# Altium PCB hbridge.PcbDoc
Units mm, origin at the board's own origin, x right, y up, seen from the top; angles counter-clockwise.
Board outline 90 x 39 mm, 2 copper layers (Top Layer, Bottom Layer); 97 components, 71 nets, 364 pads, 101 vias.
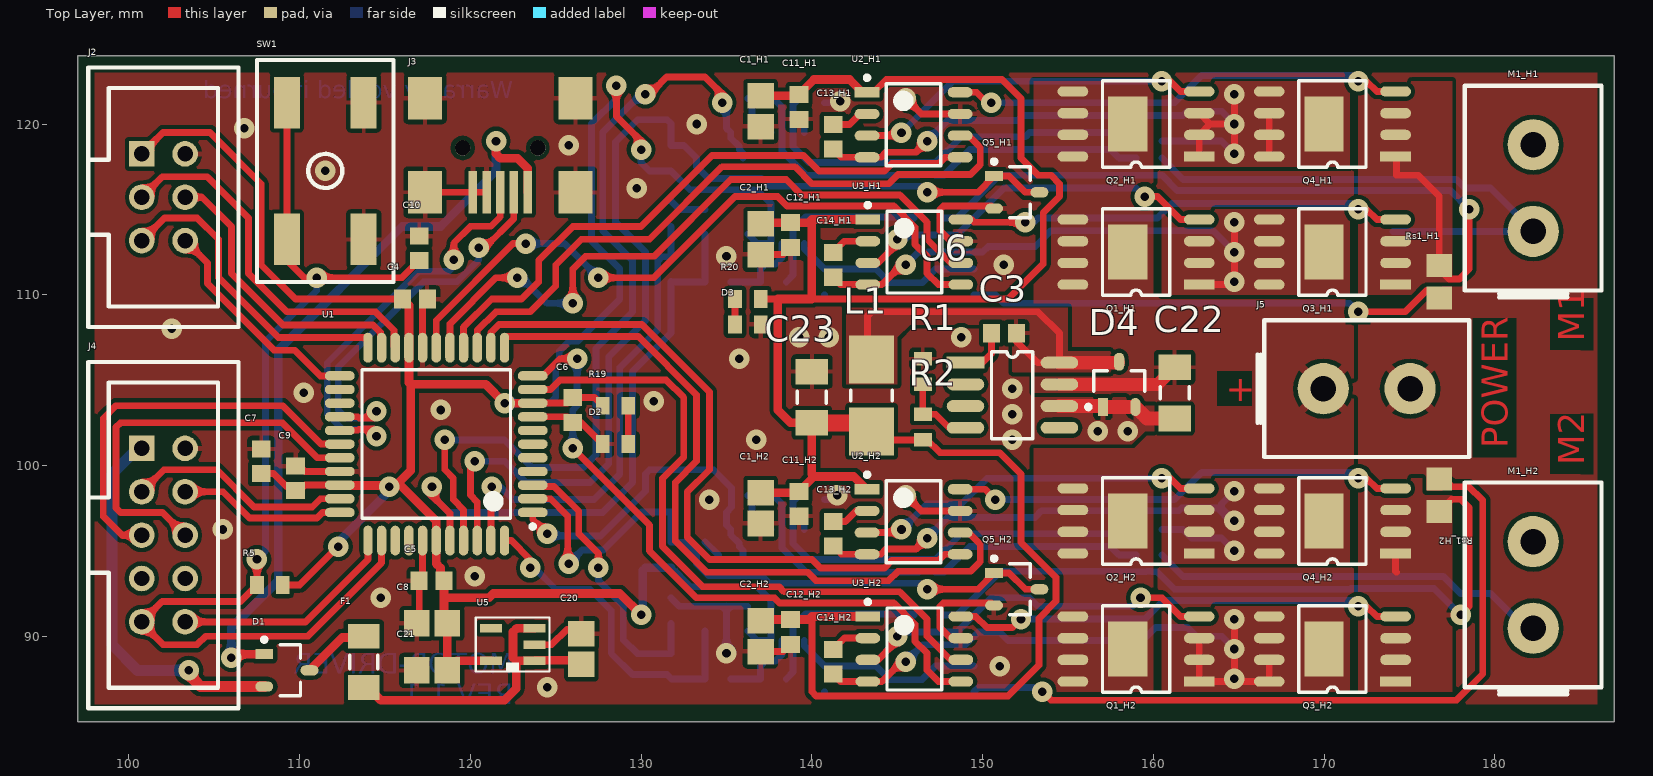
[diagram p0: Top Layer view]
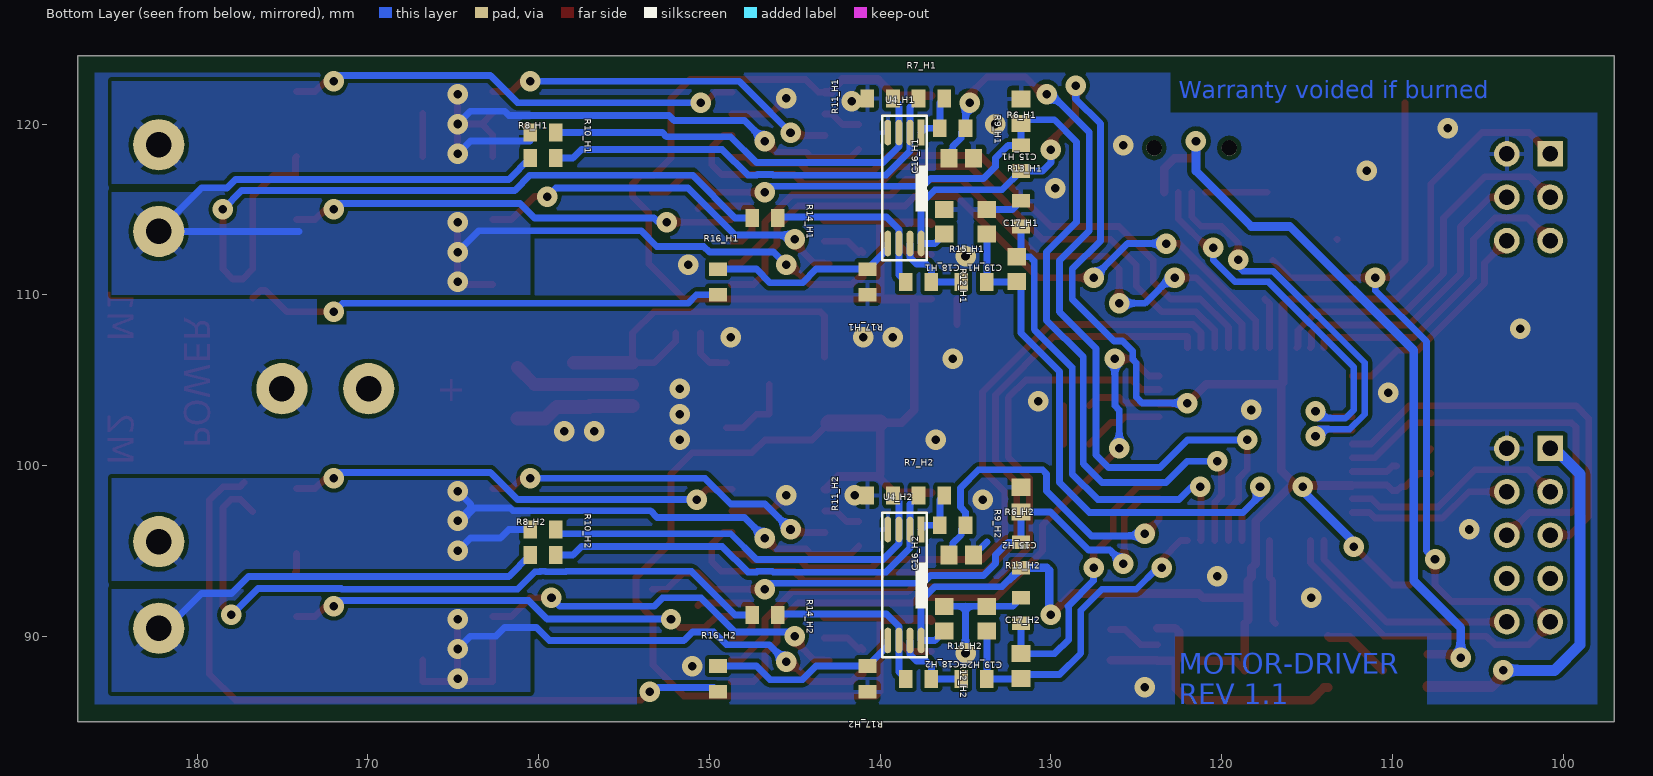
[diagram p1: Bottom Layer view, seen from below]

## Layer stack, top to bottom
Top Solder: solder mask 0.0102, Solder Resist, Dk 3.5
Top Layer: signal copper 0.0356
Dielectric1: dielectric 0.32, FR-4, Dk 4.8
Bottom Layer: signal copper 0.0356
Bottom Solder: solder mask 0.0102, Solder Resist, Dk 3.5

## Board outline
187,124 97,124 97,85 187,85

## Design rules (kind name [scope] priority, off if disabled: settings)
BoardOutlineClearance [All] p1: gap=1 ignorepadtopadclearanceinfootprint=FALSE
Clearance [All] p1: gap=0.25 ignorepadtopadclearanceinfootprint=FALSE except(0: Arc-Hole Track-Hole SMDPad-Hole THPad-Hole Via-Hole Fill-Hole Poly-Hole Region-Hole Text-Hole)
DiffPairsRouting [All] p1: maxlimit=0.254 minlimit=0.254 mostfreqgap=0.254 toplayer_minwidth=0.381 toplayer_maxwidth=0.381 toplayer_prefwidth=0.381 bottomlayer_minwidth=0.381 bottomlayer_maxwidth=0.381 bottomlayer_prefwidth=0.381 maxuncoupledlength=12.7
FabricationTestPointUsage TestPointUsage [All] p1: valid=0 allowmultiple=FALSE
FabricationTestpoint Testpoint [All] p1: side=3 testpointundercomponent=TRUE minsize=1.016 maxsize=2.54 preferedsize=1.524 minholesize=0 maxholesize=1.016 preferedholesize=0.813 testpointgrid=0.025 allowsidetop=TRUE allowsidebottom=TRUE usegrid=TRUE gridtolerance=0
HoleSize [All] p1: absolutevalues=TRUE maxlimit=5 minlimit=0.4 maxpercent=80.000 minpercent=20.000
PolygonConnect PolygonConnect_R16 [All vs InComponent('R16_H1') OR InComponent('R16_H2')] p1: thpad.connectstyle=Relief thpad.reliefconductorwidth=0.254 thpad.reliefentries=4 thpad.polygonreliefangle="90 Angle" thpad.airgapwidth=0.254 smdpad.connectstyle=NoConnect smdpad.reliefconductorwidth=0.254 smdpad.reliefentries=4 smdpad.polygonreliefangle="90 Angle" smdpad.airgapwidth=0.254 via.connectstyle=Relief via.reliefconductorwidth=0.254 via.reliefentries=4 via.polygonreliefangle="90 Angle" via.airgapwidth=0.254
PolygonConnect PolygonConnect_MAB_vias [InNet('MA_H1') OR InNet('MA_H2') OR InNet('MB_H1') OR InNet('MB_H2') vs IsVia] p2: connectstyle=Direct reliefconductorwidth=0.254 reliefentries=4 polygonreliefangle="90 Angle" airgapwidth=0.254
PolygonConnect PolygonConnect_GND [InNet('GND') vs IsVia] p3: connectstyle=Direct reliefconductorwidth=0.254 reliefentries=4 polygonreliefangle="90 Angle" airgapwidth=0.254
PolygonConnect PolygonConnect_MC [All vs InComponent('M1_H1') OR InComponent('M1_H2') or InComponent('J5')] p4: connectstyle=Relief reliefconductorwidth=0.5 reliefentries=4 polygonreliefangle="45 Angle" airgapwidth=0.254
PolygonConnect PolygonConnect_Q1-Q3 [All vs (HasFootprint('AGV_PWRSO2') OR InComponent('Rs1_H1') OR InComponent('Rs1_H2') OR InComponent('L1') OR InComponent('U6'))] p5: connectstyle=Direct reliefconductorwidth=0.254 reliefentries=4 polygonreliefangle="90 Angle" airgapwidth=0.254
PolygonConnect [All] p6: connectstyle=Relief reliefconductorwidth=0.254 reliefentries=4 polygonreliefangle="90 Angle" airgapwidth=0.254
RoomDefinition H2 [InComponentClass('H2')] p1: confinementstyle=ConfineIn formatcopy=TRUE lockcomponents=FALSE outline 130,85 187,85 187,100.75 130,100.75
RoomDefinition H1 [InComponentClass('H1')] p2: confinementstyle=ConfineIn formatcopy=TRUE lockcomponents=FALSE outline 130,108.25 187,108.25 187,124 130,124
RoomDefinition controller [InComponentClass('controller')] p3: confinementstyle=ConfineIn formatcopy=TRUE lockcomponents=FALSE outline 97,85 130,85 130,124 97,124
RoutingVias [All] p1: holewidth=0.5 width=1.2 viastyle="Through Hole" minholewidth=0.4 minwidth=0.9 maxholewidth=5 maxwidth=6
SilkToSolderMaskClearance SilkscreenOverComponentPads [IsPad] p1: minsilkscreentomaskgap=0.2 clearancetoexposedcopper=TRUE
SolderMaskExpansion SolderMaskExpansion_tentedvias [IsVia and (WithinRoom('H1') or WithinRoom('H2'))] p1 off: expansion=-5
SolderMaskExpansion [All] p2: expansion=0.102
Width "Schematic Width Constraint_5" [InNet('NetD1_3')] p1: maxlimit=5 minlimit=0.4 preferedwidth=0.75
Width "Schematic Width Constraint_4" [InNet('NetC20_2')] p2: maxlimit=5 minlimit=0.4 preferedwidth=0.75
Width "Schematic Width Constraint_2" [InNet('VBUS')] p3: maxlimit=5 minlimit=0.4 preferedwidth=0.75
Width "Schematic Width Constraint_1" [InNet('5V')] p4: maxlimit=5 minlimit=0.4 preferedwidth=0.75
Width "Schematic Width Constraint" [InNet('3V3')] p5: maxlimit=5 minlimit=0.4 preferedwidth=0.75
Width "Schematic Width Constraint_3" [InNet('VBAT')] p6: maxlimit=5 minlimit=0.4 preferedwidth=0.75
Width [All] p7: maxlimit=5 minlimit=0.25 preferedwidth=0.4
25 further rules are at their usual default settings.

## Classes and differential pairs
component class controller: C4 C5 C6 C7 C8 C9 C10 J2 J3 J4 R5 SW1 U1
component class H1: C1_H1 C2_H1 C11_H1 C12_H1 C13_H1 C14_H1 C15_H1 C16_H1 C17_H1 C18_H1 C19_H1 M1_H1 Q1_H1 Q2_H1 Q3_H1 Q4_H1 Q5_H1 R6_H1 R7_H1 R8_H1 R9_H1 R10_H1 R11_H1 R12_H1 R13_H1 R14_H1 R15_H1 R16_H1 R17_H1 Rs1_H1 U2_H1 U3_H1 U4_H1
component class H2: C1_H2 C2_H2 C11_H2 C12_H2 C13_H2 C14_H2 C15_H2 C16_H2 C17_H2 C18_H2 C19_H2 M1_H2 Q1_H2 Q2_H2 Q3_H2 Q4_H2 Q5_H2 R6_H2 R7_H2 R8_H2 R9_H2 R10_H2 R11_H2 R12_H2 R13_H2 R14_H2 R15_H2 R16_H2 R17_H2 Rs1_H2 U2_H2 U3_H2 U4_H2
component class PSU: C3 C20 C21 C22 C23 D1 D2 D3 D4 F1 J5 L1 R1 R2 R19 R20 U5 U6
channel class hbridge: H1 H2
differential pair D: +D_P -D_N

## Components (designator, comment, footprint, x,y, rotation, side; value= is the part's Value field where it differs from the comment)
C1_H1 "CAP" CAPC2012X11M 137,120.75 r90 top (schematic designator C1)
C1_H2 "CAP" CAPC2012X11M 137,97.5 r90 top (schematic designator C1)
C2_H1 "CAP" CAPC2012X11M 137,113.25 r90 top (schematic designator C2)
C2_H2 "CAP" CAPC2012X11M 137,90 r90 top (schematic designator C2)
C3 "CAP" CAPC1608X08M 151.25,107.75 r180 top
C4 "CAP" CAPC1608X08M 116.75,109.75 r180 top
C5 "CAP" CAPC1608X08M 117.725,93.25 r0 top
C6 "CAP" CAPC1608X08M 126,103.25 r90 top
C7 "CAP" CAPC1608X08M 107.75,100.25 r270 top
C8 "CAP" CAPC2012X11M 117.75,90.75 r0 top
C9 "CAP" CAPC1608X08M 109.75,99.25 r270 top
C10 "CAP" CAPC1608X08M 117,112.725 r270 top
C11_H1 "CAP" CAPC1608X08M 139.25,121 r90 top (schematic designator C11)
C11_H2 "CAP" CAPC1608X08M 139.25,97.75 r90 top (schematic designator C11)
C12_H1 "CAP" CAPC1608X08M 138.75,113.5 r90 top (schematic designator C12)
C12_H2 "CAP" CAPC1608X08M 138.75,90.25 r90 top (schematic designator C12)
C13_H1 "CAP" CAPC1608X08M 141.25,119.25 r90 top (schematic designator C13)
C13_H2 "CAP" CAPC1608X08M 141.25,96 r90 top (schematic designator C13)
C14_H1 "CAP" CAPC1608X08M 141.25,111.75 r90 top (schematic designator C14)
C14_H2 "CAP" CAPC1608X08M 141.25,88.5 r90 top (schematic designator C14)
C15_H1 "CAP" CAPC1608X08M 131.75,120.75 r270 bottom (schematic designator C15)
C15_H2 "CAP" CAPC1608X08M 131.75,98 r270 bottom (schematic designator C15)
C16_H1 "CAP" CAPC1608X08M 135.25,118 r0 bottom (schematic designator C16)
C16_H2 "CAP" CAPC1608X08M 135.25,94.75 r0 bottom (schematic designator C16)
C17_H1 "CAP" CAPC1608X08M 132,111.5 r90 bottom (schematic designator C17)
C17_H2 "CAP" CAPC1608X08M 131.75,88.25 r90 bottom (schematic designator C17)
C18_H1 "CAP" CAPC1608X08M 136.25,114.275 r270 bottom (schematic designator C18)
C18_H2 "CAP" CAPC1608X08M 136.25,91.025 r270 bottom (schematic designator C18)
C19_H1 "CAP" CAPC1608X08M 133.75,114.275 r270 bottom (schematic designator C19)
C19_H2 "CAP" CAPC1608X08M 133.75,91.025 r270 bottom (schematic designator C19)
C20 "CAP" CAPC2012X11M 126.5,89.25 r270 top
C21 "CAP" CAPC2012X11M 117.75,88 r0 top
C22 "CAP" CAPC3216X14M 161.25,104.25 r90 top
C23 "CAP" CAPC3216X14M 140,104 r270 top
D1 "BAS40-05" SOT23 109.25,88 r0 top
D2 "RED" RESC1608X06M 128.5,101.25 r180 top
D3 "RED" RESC1608X06M 136.25,108.25 r0 top
D4 "BAS40-05" SOT23 158,104.75 r90 top
F1 "POLYFUSE" RESC3216X07M 113.75,88.5 r90 top
J2 "IDC6" IDC6 102.02,115.71 r0 top
J3 "USBMINI" MINI_USB 121.75,118.75 r180 top
J4 "IDC10" IDC10 102.02,95.92 r0 top
J5 "VBAT" BAT_CNCTR 172.5,104.5 r90 top locked
L1 "IND" INDC3924X34M 143.5,104.1 r270 top
M1_H1 "VBAT" BAT_CNCTR 182.25,116.25 r180 top (schematic designator M1)
M1_H2 "VBAT" BAT_CNCTR 182.25,93 r180 top locked (schematic designator M1)
Q1_H1 "PSMN014-10YS" AGV_PWRSO2 162.691,110.595 r180 top (schematic designator Q1)
Q1_H2 "PSMN014-10YS" AGV_PWRSO2 162.691,87.345 r180 top (schematic designator Q1)
Q2_H1 "PSMN014-10YS" AGV_PWRSO2 162.691,118.095 r180 top (schematic designator Q2)
Q2_H2 "PSMN014-10YS" AGV_PWRSO2 162.691,94.845 r180 top (schematic designator Q2)
Q3_H1 "PSMN014-10YS" AGV_PWRSO2 174.191,110.595 r180 top (schematic designator Q3)
Q3_H2 "PSMN014-10YS" AGV_PWRSO2 174.191,87.345 r180 top locked (schematic designator Q3)
Q4_H1 "PSMN014-10YS" AGV_PWRSO2 174.191,118.095 r180 top (schematic designator Q4)
Q4_H2 "PSMN014-10YS" AGV_PWRSO2 174.191,94.845 r180 top locked (schematic designator Q4)
Q5_H1 "" SOT23 152,116 r0 top (schematic designator Q5)
Q5_H2 "" SOT23 152,92.75 r0 top (schematic designator Q5)
R1 "RES" RESC1608X06M 146.5,105.5 r270 top
R2 "RES" RESC1608X06M 146.5,102.25 r270 top
R5 "RES" RESC1608X06M 108.25,93 r0 top
R6_H1 "RES" RESC1608X06M 131.75,118 r270 bottom (schematic designator R6)
R6_H2 "RES" RESC1608X06M 131.75,94.75 r270 bottom (schematic designator R6)
R7_H1 "RES" RESC1608X06M 137,121.5 r180 bottom (schematic designator R7)
R7_H2 "RES" RESC1608X06M 137,98.25 r180 bottom (schematic designator R7)
R8_H1 "RES" RESC1608X06M 159.75,118 r180 bottom (schematic designator R8)
R8_H2 "RES" RESC1608X06M 159.75,94.75 r180 bottom (schematic designator R8)
R9_H1 "RES" RESC1608X06M 135.75,119.75 r180 bottom (schematic designator R9)
R9_H2 "RES" RESC1608X06M 135.75,96.5 r180 bottom (schematic designator R9)
R10_H1 "RES" RESC1608X06M 159.75,119.5 r180 bottom (schematic designator R10)
R10_H2 "RES" RESC1608X06M 159.75,96.25 r180 bottom (schematic designator R10)
R11_H1 "RES" RESC1608X06M 140,121.5 r0 bottom (schematic designator R11)
R11_H2 "RES" RESC1608X06M 140,98.25 r0 bottom (schematic designator R11)
R12_H1 "RES" RESC1608X06M 137.75,110.75 r180 bottom (schematic designator R12)
R12_H2 "RES" RESC1608X06M 137.75,87.5 r180 bottom (schematic designator R12)
R13_H1 "RES" RESC1608X06M 131.75,114.75 r90 bottom (schematic designator R13)
R13_H2 "RES" RESC1608X06M 131.75,91.5 r90 bottom (schematic designator R13)
R14_H1 "RES" RESC1608X06M 146.75,114.5 r180 bottom (schematic designator R14)
R14_H2 "RES" RESC1608X06M 146.75,91.25 r180 bottom (schematic designator R14)
R15_H1 "RES" RESC1608X06M 134.5,110.75 r180 bottom (schematic designator R15)
R15_H2 "RES" RESC1608X06M 134.5,87.5 r180 bottom (schematic designator R15)
R16_H1 "RES" RESC1608X06M 149.5,110.75 r90 bottom (schematic designator R16)
R16_H2 "RES" RESC1608X06M 149.5,87.5 r90 bottom (schematic designator R16)
R17_H1 "RES" RESC1608X06M 140.75,110.75 r270 bottom (schematic designator R17)
R17_H2 "RES" RESC1608X06M 140.75,87.5 r270 bottom (schematic designator R17)
R19 "RES" RESC1608X06M 128.5,103.5 r0 top
R20 "RES" RESC1608X06M 136.25,109.75 r180 top
Rs1_H1 "RES" RESC2012X07M 176.75,110.75 r90 top (schematic designator Rs1)
Rs1_H2 "RES" RESC2012X07M 176.75,98.25 r270 top (schematic designator Rs1)
SW1 "SWITCH" Switch_pad 111.5,117.25 r270 top
U1 "" 44A_N 118,101.25 r180 top
U2_H1 "MIC4605-1YM" SOIC8 145.959,119.955 r0 top (schematic designator U2)
U2_H2 "MIC4605-1YM" SOIC8 145.959,96.705 r0 top (schematic designator U2)
U3_H1 "MIC4605-1YM" SOIC8 146,112.5 r0 top (schematic designator U3)
U3_H2 "MIC4605-1YM" SOIC8 146,89.25 r0 top (schematic designator U3)
U4_H1 "" TSSOP8 137.6,119.5 r270 bottom (schematic designator U4)
U4_H2 "" TSSOP8 137.6,96.25 r270 bottom (schematic designator U4)
U5 "MIC5504" SOT23-5 123.75,88.56 r180 top
U6 "LM2671M-ADJ" AGV_SO-8 149,106.02 r0 top

## Footprints (in the part's own frame and the unit in brackets; to place one, negate y for a bottom-side part, rotate by r counter-clockwise, add the part's x,y. Pads: shape width x height; smd on the part's side, far side on the other; paste and mask are expansions set on the pad)
44A_N [mm] "Thin QFP, 44-Leads, Body 10x10mm, Pitch 0.8mm, IPC Medium Density"
  oval 1.75x0.55 smd: 1(-5.65,4) 2(-5.65,3.2) 3(-5.65,2.4) 4(-5.65,1.6) 5(-5.65,0.8) 6(-5.65,0) 7(-5.65,-0.8) 8(-5.65,-1.6) 9(-5.65,-2.4) 10(-5.65,-3.2) 11(-5.65,-4) 23(5.65,-4) 24(5.65,-3.2) 25(5.65,-2.4) 26(5.65,-1.6) 27(5.65,-0.8) 28(5.65,0) 29(5.65,0.8) 30(5.65,1.6) 31(5.65,2.4) 32(5.65,3.2) 33(5.65,4)
  oval 0.55x1.75 smd: 12(-4,-5.65) 13(-3.2,-5.65) 14(-2.4,-5.65) 15(-1.6,-5.65) 16(-0.8,-5.65) 17(0,-5.65) 18(0.8,-5.65) 19(1.6,-5.65) 20(2.4,-5.65) 21(3.2,-5.65) 22(4,-5.65) 34(4,5.65) 35(3.2,5.65) 36(2.4,5.65) 37(1.6,5.65) 38(0.8,5.65) 39(0,5.65) 40(-0.8,5.65) 41(-1.6,5.65) 42(-2.4,5.65) 43(-3.2,5.65) 44(-4,5.65)
  silkscreen extent -5.77,-4.35 4.35,4.95, body extent -5,-5 5,5, height 1.2
AGV_PWRSO2 [mm]
  rect 1.8x0.6 smd: 1(0,0)
  oval 1.8x0.6 smd: 1(0,-1.27) 1(0,-2.54) 2(0,-3.81) 3(7.4,-3.81) 3(7.4,-2.54) 3(7.4,-1.27) 3(7.4,0)
  rect 2.3x3.2 smd: 3(4.191,-1.905)
  silkscreen extent 1.73,-4.44 5.67,0.64
AGV_SO-8 [mm] "SOIC, 8-Leads, Body 4,89x3,94mm, Pitch 1,27mm, IPC Medium Density"
  rect 2.2x0.7 smd: 1(0,0)
  oval 2.2x0.7 smd: 2(0,-1.27) 3(0,-2.54) 4(0,-3.81) 5(5.5,-3.81) 6(5.5,-2.54) 7(5.5,-1.27) 8(5.5,0)
  silkscreen extent 1.52,-4.44 3.94,0.64
BAT_CNCTR [mm]
  round 3 hole 1.5: 1(0,2.54) 2(0,-2.54)
  silkscreen extent -4,-6 4,6.4
CAPC1608X08M [mm] "Chip Capacitor, 2-Leads, Body 1,60x0,80mm, IPC Low Density"
  rect 1x1.1 smd: 1(-0.725,0) 2(0.725,0)
  body extent -0.87,-0.48 0.87,0.47, height 0.85
CAPC2012X11M [mm] "Chip Capacitor, 2-Leads, Body 2,00x1,25mm, IPC Low Density"
  rect 1.5x1.55 smd: 1(-0.9,0) 2(0.9,0)
  body extent -1.1,-0.72 1.1,0.72, height 1.1
CAPC3216X14M [mm] "Chip Capacitor, 2-Leads, Body 3,20x1,60mm, IPC Low Density"
  rect 1.5x1.9 smd: 1(-1.5,0) 2(1.5,0)
  silkscreen extent -0.35,-0.85 0.35,0.85, body extent -1.7,-0.9 1.7,0.9, height 1.35
IDC6 [mm]
  rect 1.5x1.5 hole 0.9: 1(-1.27,2.54)
  round 1.5 hole 0.9: 2(1.27,2.54) 3(-1.27,0) 4(1.27,0) 5(-1.27,-2.54) 6(1.27,-2.54)
  silkscreen extent -4.4,-7.6 4.4,7.6, body extent -4.4,-7.6 4.4,7.6, height 9.1
IDC10 [mm]
  rect 1.5x1.5 hole 0.9: 1(-1.27,5.08)
  round 1.5 hole 0.9: 2(1.27,5.08) 3(-1.27,2.54) 4(1.27,2.54) 5(-1.27,0) 6(1.27,0) 7(-1.27,-2.54) 8(1.27,-2.54) 9(-1.27,-5.08) 10(1.27,-5.08)
  silkscreen extent -4.4,-10.14 4.4,10.14, body extent -4.4,-10.14 4.4,10.14, height 9.1
INDC3924X34M [mm] "Chip Inductor, 2-Leads, Body 3,85x2,40mm, IPC Low Density"
  rect 2.81x2.64 smd: 1(-2.1,0) 2(2.1,0)
  silkscreen extent -0.3,-1.22 0.3,1.22, body extent -2.95,-1.25 2.95,1.25, height 3.4
MINI_USB [mm]
  rect 0.5x2.5 smd: 1(-1.6,2.75) 2(-0.8,2.75) 3(0,2.75) 4(0.8,2.75) 5(1.6,2.75)
  round 0.9 hole 0.9: 10(-2.2,0.15) 11(2.2,0.15)
  rect 2x2.5 smd: C(-4.4,-2.75) C(-4.4,2.75) C(4.4,-2.75) C(4.4,2.75)
RESC1608X06M [mm] "Chip Resistor, 2-Leads, Body 1,60x0,82mm, IPC Low Density"
  rect 0.8x1.05 smd: 1(-0.75,0) 2(0.75,0)
  body extent -0.85,-0.48 0.85,0.48, height 0.6
RESC2012X07M [mm] "Chip Resistor, 2-Leads, Body 2,00x1,25mm, IPC Low Density"
  rect 1.35x1.5 smd: 1(-0.95,0) 2(0.95,0)
  body extent -1.08,-0.7 1.07,0.7, height 0.65
RESC3216X07M [mm] "Chip Resistor, 2-Leads, Body 3,20x1,60mm, IPC Low Density"
  rect 1.45x1.85 smd: 1(-1.5,0) 2(1.5,0)
  silkscreen extent -0.4,-0.82 0.4,0.82, body extent -1.68,-0.87 1.68,0.87, height 0.71
SOIC8 [mm] "SOIC, 8-Leads, Body 4,89x3,94mm, Pitch 1,27mm, IPC Medium Density"
  rect 1.45x0.6 smd: 1(-2.725,1.905)
  oval 1.45x0.6 smd: 2(-2.725,0.635) 3(-2.725,-0.635) 4(-2.725,-1.905) 5(2.725,-1.905) 6(2.725,-0.635) 7(2.725,0.635) 8(2.725,1.905)
  silkscreen extent -2.85,-2.4 1.6,2.88, body extent -2,-2.4 2,2.4, height 1.73
SOT23 [mm]
  rect 1.05x0.6 smd: 1(-1.325,0.95)
  oval 1.05x0.6 smd: 2(-1.325,-0.95) 3(1.325,0)
  silkscreen extent -1.45,-1.5 0.8,1.92, body extent -0.8,-1.5 0.8,1.5, height 1.45
SOT23-5 [mil]
  rect 50x20 smd: 1(0,0) 2(0,-37) 3(0,-75) 4(100,-75) 5(100,0)
  silkscreen extent -35,-100 135,25, body extent 2,-95 98,20, height 52
Switch_pad [mm]
  rect 3x1.524 smd: 1(-4,2.25) 1(4,2.25) 2(-4,-2.25) 2(4,-2.25)
  silkscreen extent -6.5,-4 6.5,4
TSSOP8 [mm]
  rect 1.5x0.4 smd: 1(0,0)
  oval 1.5x0.4 smd: 2(0,-0.65) 3(0,-1.3) 4(0,-1.95) 5(6.5,-1.95) 6(6.5,-1.3) 7(6.5,-0.65) 8(6.5,0)
  silkscreen extent -0.98,-2.28 7.48,0.33, body extent -0.06,-2.26 6.52,0.3, height 1.04

## Part data
C1_H1 C1_H2 C2_H1 C2_H2 C3 C4 C5 C6 C7 C8 C9 C10 C11_H1 C11_H2 C12_H1 C12_H2 C13_H1 C13_H2 C14_H1 C14_H2 C15_H1 C15_H2 C16_H1 C16_H2 C17_H1 C17_H2 C18_H1 C18_H2 C19_H1 C19_H2 C20 C21 C22 C23: "Capacitor"
D2 D3: library part LED
F1: "Polyfuse"
J2: "6pin IDC connector"
J3: library part MINI_USB
J4: "10pin IDC connector"
J5 M1_H1 M1_H2: library part BAT_CNCTR, "2-pin batteri kontakt"
L1: library part AGV_IND, "Inductor"
Q5_H1 Q5_H2: library part 2N3904, "NPN General Purpose Amplifier"
R1 R2 R5 R6_H1 R6_H2 R7_H1 R7_H2 R8_H1 R8_H2 R9_H1 R9_H2 R10_H1 R10_H2 R11_H1 R11_H2 R12_H1 R12_H2 R13_H1 R13_H2 R14_H1 R14_H2 R15_H1 R15_H2 R16_H1 R16_H2 R17_H1 R17_H2 R19 R20 Rs1_H1 Rs1_H2: "Resistor"
SW1: library part Switch, "Switch"
U1: library part ATxmega32A4U-AU, "8/16-bit AVR XMEGA A4U Microcontroller, 1.6-3.6V, 32MHz, 32K + 4KB Flash, 1K EEPROM, 4K SRAM, 44-pin TQFP, Industrial Grade (-40°C to 85°C)"
U4_H1 U4_H2: library part LM358PWR, "Low Power Dual Operational Amplifier, 8-pin Narrow SOIC"
U5: library part MIC5504-3.3
U6: library part LM2671M

## Via types
v1: diameter 1.2, hole 0.5, Top Layer to Bottom Layer, 101 vias

## Nets (pads, with @x,y where several pads share a name; then routed paths per layer and width w, separated by ;. In a path a pad name is that pad's centre, name@x,y a point inside that pad or via, vN(x,y) a via of type N, cw(c..) or ccw(c..) an arc to the next point about the centre after c; other vN are vias at no path point)
3V3: C4.2 C5.2 C6.2 C7.2 C8.2 C9.2 C18_H1.2 C18_H2.2 C21.2 J2.1 R5.2 R6_H1.2 R6_H2.2 R19.1 U1.9 U1.19 U1.31 U1.39 U4_H1.8 U4_H2.8 U5.5 | length 147.6
  Top Layer w0.4: J2.1 102,119.5 104.75,119.5 107.75,116.5 107.75,111.75 109.75,109.75 C4.2 C4.2@116.4,109.375 ; C7.2 108.475,99.525 109.25,98.75 109.5,98.75 109.725,98.525 C9.2 110,98.525 110.325,98.85 U1.31 ; R5.2 110,93 v1(112.25,95.25) ; v1(115.25,98.75) 115.55,98.75 v1@115.65,98.85 ; C8.2@118.45,90.95 C8.2 ; C21.2 C21.2@119.21,88.56 ; U1.9 125.675,103.65 C6.2 127.275,103.975 R19.1 ; v1(128.55,122.25) 128.55,120.45 130,119 v1(130,118.5)
  Top Layer w0.508: U1.31 112.371,98.829 115.171,98.829 v1(115.25,98.75) ; C4.2@116.4,109.375 U1.19 116.4,104.85 116.5,104.75 ; C8.2@118.45,90.95 118.45,92.25 ; C21.2 C8.2 ; C21.2@119.21,88.56 U5.5 ; U1.9 v1(122,103.65) 120.9,104.75 116.5,104.75 ; v1(130,91.25) 128.75,92.5 121.337,92.5 121.087,92.25 118.45,92.25 ; 116.5,104.75 116.5,99.7 115.775,98.975 118,96.75 U1.39 118.004,95.596 118.004,94.246 118.25,94 118.25,93.45 C5.2 118.45,92.25
  Bottom Layer w0.4: v1@115.25,98.5 v1(115.25,98.75) ; v1(122,103.65) 124.65,103.65 125,104 125,106 125.2,106.2 125.2,106.685 125.815,107.3 126.3,107.3 128.75,109.75 128.75,111.5 127.1,113.15 127.1,120.019 128.55,121.469 v1(128.55,122.25) ; v1(130,118.5) 130,117.751 130.5,117.25 R6_H1.2 132.85,116.15 136.786,116.15 137.6,115.336 U4_H1.8 136.8,113 C18_H1.2 ; R6_H2.2 132.85,92.9 136.786,92.9 137.6,92.086 U4_H2.8 136.8,89.75 C18_H2.2
  Bottom Layer w0.5: v1(112.25,95.25) 112.25,95.5 v1@115.25,98.5
  Bottom Layer w0.508: v1(130,91.25) 130.104,91.354 130.104,93.854 130.25,94 R6_H2.2
5V: D1.2 J4.1 | length 22.5
  Top Layer w0.635: v1(103.5,88) 103.5,87.75 104.2,87.05 D1.2
  Bottom Layer w0.635: J4.1 100.5,101 99,99.5 99,89.5 100.5,88 v1(103.5,88)
12V: C1_H1.2 C1_H2.2 C2_H1.2 C2_H2.2 C11_H1.2 C11_H2.2 C12_H1.2 C12_H2.2 C23.2 L1.2 R2.2 R20.1 U2_H1.1 U2_H2.1 U3_H1.1 U3_H2.1 | length 126.6
  Top Layer w0.4: R20.1 138,109.75 ; 140,91.155 140,86.75 140.25,86.5 151.5,86.5 153.3,88.3 153.3,91.05 154.3,92.05 154.3,93.45 152.25,95.5 152.25,99.5 151,100.75 147.5,100.75 146.75,101.5 R2.2 144,101.5 L1.2 L1.2@143,102.5 ; 140,99.483 140.129,99.354 ; 140,109.75 151.5,109.75 153.55,111.8 153.55,114.8 154.5,115.75 154.5,116.5 154,117 153.25,117 152.25,118 152.25,121.5 151.14,122.61 144.36,122.61 143.61,121.86 U2_H1.1
  Top Layer w0.5: 140,99.483 C23.2 138.75,102.5 138,103.25 138,109.75 140,109.75
  Top Layer w0.508: C2_H2.2 137.075,90.975 C12_H2.2 139.82,90.975 140,91.155 U3_H2.1 ; C1_H2.2 139.175,98.4 C11_H2.2 140.129,99.354 142.457,99.354 143.104,98.707 143.104,98.61 U2_H2.1 ; C2_H1.2 137.075,114.225 C12_H1.2 139.82,114.225 140,114.405 ; C1_H1.2 139.175,121.65 C11_H1.2 140.129,122.604 142.207,122.604 142.854,121.957 142.854,121.86 U2_H1.1 ; 140,109.75 140,114.405 ; U3_H1.1 140,114.405
  Top Layer w1: C23.2 L1.2@143,102.5
BEMF_H1: R7_H1.2 R9_H1.1 U4_H1.1 | length 3.1
  Bottom Layer w0.4: R7_H1.2 136.5,121.25 R9_H1.1 137.35,119.75 U4_H1.1
BEMF_H2: R7_H2.2 R9_H2.1 U4_H2.1 | length 3.1
  Bottom Layer w0.4: R7_H2.2 136.5,98 R9_H2.1 137.35,96.5 U4_H2.1
CURR_H1: R12_H1.2 R15_H1.1 U4_H1.7 | length 4.9
  Bottom Layer w0.4: R15_H1.1 R12_H1.2 137,111.5 137.3,111.8 137.869,111.8 138.25,112.181 U4_H1.7
CURR_H2: R12_H2.2 R15_H2.1 U4_H2.7 | length 4.9
  Bottom Layer w0.4: R15_H2.1 R12_H2.2 137,88.25 137.3,88.55 137.869,88.55 138.25,88.931 U4_H2.7
D_N: J3.2 U1.26 | length 23.4
  Top Layer w0.381: U1.26 113.415,102.85 113.498,102.768 114.25,102.768 114.5,103.017 v1(114.5,103.177) ; v1(120.5,112.75) 120.838,112.75 122.55,114.461 J3.2
  Bottom Layer w0.381: v1(114.5,103.177) 114.09,102.768 112.75,102.768 112.25,103.267 112.25,105.75 117.25,110.75 119.204,110.75 120.5,112.046 v1(120.5,112.75)
D_P: J3.3 U1.27 | length 25.3
  Top Layer w0.381: U1.27 113.415,102.05 113.498,102.133 114.25,102.133 114.5,101.883 v1(114.5,101.723) ; v1(119.027,112.05) 119.027,113.027 120,114 121.191,114 121.75,114.56 J3.3
  Bottom Layer w0.381: v1(114.5,101.723) 114.09,102.133 112.487,102.133 111.615,103.004 111.615,106.013 116.987,111.385 118.75,111.385 119.415,112.05 v1(119.027,112.05)
E1A: J2.3 U1.20 | length 22
  Top Layer w0.4: J2.3 101.95,116.91 104.59,116.91 107,114.5 107,111.25 109.25,109 114.445,109 115.525,107.92 115.525,106.975 U1.20
E1B: J2.4 U1.21 | length 17.3
  Top Layer w0.4: J2.4 104.29,115.71 106,114 106,111.25 109.025,108.225 114.3,108.225 114.725,107.8 114.725,106.975 U1.21
E2A: J2.5 U1.22 | length 18.8
  Top Layer w0.4: J2.5@101.05,113.17 J2.5 102.08,114.5 104,114.5 105.25,113.25 105.25,111 108.75,107.5 113.75,107.5 114,107.25 U1.22
E2B: J2.6 U1.23 | length 13
  Top Layer w0.4: J2.6 104.6,111.86 104.6,110.65 108.5,106.75 109.71,106.75 111.21,105.25 U1.23
GND: C1_H1.1 C1_H2.1 C2_H1.1 C2_H2.1 C4.1 C5.1 C6.1 C7.1 C8.1 C9.1 C10.1 C11_H1.1 C11_H2.1 C12_H1.1 C12_H2.1 C15_H1.1 C15_H2.1 C16_H1.1 C16_H2.1 C18_H1.1 C18_H2.1 C19_H1.1 C19_H2.1 C20.1 C21.1 C22.1 C23.1 D2.2 D3.2 D4.1 D4.2 J2.2 J3.4 J3.5 J3.C J4.2 J5.2 Q5_H1.2 Q5_H2.2 R1.1 R11_H1.2 R11_H2.2 R13_H1.2 R13_H2.2 R16_H1.1 R16_H2.1 R17_H1.2 R17_H2.2 Rs1_H1.1 Rs1_H2.1 SW1.1 U1.8 U1.18 U1.30 U1.38 U2_H1.7 U2_H2.7 U3_H1.7 U3_H2.7 U4_H1.4 U4_H2.4 U5.2 U6.6 | length 136.8
  Top Layer w0.4: C7.1 C7.1@107.975,100.75 ; C9.1 110,99.975 110.325,99.65 U1.30 ; SW1.1@113.225,113.225 SW1.1@113.25,113.25 ; C8.1 117,90.9 C5.1 117.2,93.45 U1.38 ; U1.18 117.2,109.475 C4.1 ; J3.C@117.35,116 J3.5 J3.4 ; U1.8 125.675,102.85 C6.1 126.475,102.525 D2.2 ; U5.2 124.75,89.5 125.65,90.4 C20.1@126.5,90.4 ; v1(135,89) v1@135.1,89.1 ; v1(135,112.25) v1@135.1,112.35 ; C2_H2.1 138.325,89.1 C12_H2.1 ; C2_H1.1 138.325,112.35 C12_H1.1 ; v1(141.659,121.325) v1@141.675,121.325 ; v1(145.5,98.25) 146.41,97.34 U2_H2.7 ; v1(145.5,121.5) 146.41,120.59 U2_H1.7 ; U3_H2.7 148.115,89.885 147.5,90.5 147.5,91.75 147.7,91.95 150.525,91.95 Q5_H2.2 ; U3_H1.7 148.115,113.135 147.5,113.75 147.5,115 147.7,115.2 150.525,115.2 Q5_H1.2 ; v1(153.5,86.75) 154,86.25 177.75,86.25 179.3,87.8 179.3,97.95 179.25,98 178.5,98.75 177.5,98.75 Rs1_H2.1@177.25,99 ; D4.1@156.995,103.48 D4.1 ; v1(172,109) 174.75,109 176,110.25 176.3,110.25 Rs1_H1.1
  Top Layer w0.8: U6.6 D4.1@156.995,103.48 ; D4.1 D4.2 159.625,102.75 C22.1
  Bottom Layer w0.4: R13_H2.2 132.25,91.75 C19_H2.1 135,91.75 ; R13_H1.2 132.25,115 C19_H1.1 ; 133.75,95.525 C16_H2.1 ; v1(135,89) 135,91.75 ; C18_H2.1 135,91.75 ; U4_H2.4 U4_H2.4@139.55,96.8 ; U4_H1.4 U4_H1.4@139.55,120.05 ; R11_H2.2@140.75,98 R11_H2.2@141,98 ; R11_H1.2@140.75,121.25 R11_H1.2@141,121.25 ; v1@141.5,121.5 141.675,121.325 v1(141.659,121.325) ; R16_H2.1 149.75,87 v1@153,87 ; R16_H1.1 150.75,110 151.25,109.5 171.5,109.5 v1(172,109)
  other v1: 124.5,87 151,88.25 114.75,92.25 120.25,93.5 105.5,96.25 134,98 141.5,98.25 136.75,101.5 151.75,101.5 156.75,102 158.5,102 151.75,103 118.25,103.25 130.75,103.75 110.25,104.25 151.75,104.5 135.75,106.25 139.25,107.5 141,107.5 148.75,107.5 102.5,108 151.25,111.75 129.75,116.25 111.5,117.25 125.75,118.75 106.75,119.75 133.25,120
GPIO_0: J4.5 U1.28 | length 23.5
  Top Layer w0.4: J4.5 99.58,95.92 98.5,97 98.5,102.75 99.25,103.5 109,103.5 111.25,101.25 U1.28
GPIO_1: J4.6 U1.29 | length 23.5
  Top Layer w0.4: J4.6 101.96,97.25 99.5,97.25 99.25,97.5 99.25,102.25 99.5,102.5 109,102.5 111.05,100.45 U1.29
H1-BEMF: C16_H1.2 R9_H1.2 U1.41 | length 49.7
  Top Layer w0.4: v1(118.5,101.5) 118.5,99.75 119,99.25 119,98 119.6,97.4 U1.41 ; v1(130.25,121.75) 130.5,121.75 130.75,122 131.5,122.75 133.75,122.75 134.75,121.75 v1(134.75,121.25)
  Bottom Layer w0.4: v1(118.5,101.5) 122,101.5 123.617,99.883 126.617,99.883 127.35,100.615 127.35,106.85 129.5,109 129.5,112 127.75,113.75 127.75,119.5 130,121.75 v1(130.25,121.75) ; v1(134.75,121.25) 135,121 R9_H1.2 135.25,119.5 135.25,119.189 135.75,118.689 135.75,118.5 135.975,118.275 C16_H1.2
H1-CURR: C17_H1.1 C19_H1.2 R15_H1.2 U1.40 | length 34.5
  Top Layer w0.4: v1(117.75,98.75) 117.75,98.25 118.8,97.2 U1.40
  Bottom Layer w0.4: v1(117.75,98.75) 117.75,98.25 118.75,97.25 127.75,97.25 129.5,99 129.5,105.5 131.75,107.75 131.75,110.775 131.775,110.75 R15_H1.2 C19_H1.2
H1-LH: U1.15 U2_H1.5 | length 35.9
  Top Layer w0.4: U1.15 119.6,108.1 121.25,109.75 123,109.75 124,110.75 124,112 126,114 130,114 134.15,118.15 139.519,118.15 140.419,117.25 144.25,117.25 144.7,117.7 147.45,117.7 147.8,118.05 U2_H1.5
H1-LL: U1.14 U2_H1.6 | length 38.5
  Top Layer w0.4: U1.14 120.4,107.9 121.5,109 123.5,109 125,110.5 125,111.75 126.5,113.25 130.5,113.25 134.75,117.5 139,117.5 140,116.5 144.5,116.5 145.05,117.05 149.3,117.05 149.859,117.609 149.859,118.641 149.18,119.32 U2_H1.6
H1-RH: U1.17 U3_H1.5 | length 40.3
  Top Layer w0.4: U1.17 118,108.5 122.5,113 v1(123.25,113) ; v1(127.5,111) 130.75,111 135.5,115.75 138,115.75 138.55,115.2 144.8,115.2 146.05,113.95 146.05,112.95 146.742,112.258 146.742,111.258 147.405,110.595 U3_H1.5
  Bottom Layer w0.4: v1(123.25,113) 125.5,113 v1(127.5,111)
H1-RL: U1.16 U3_H1.6 | length 40.2
  Top Layer w0.4: U1.16 118.8,108.3 121.5,111 v1(122.75,111) ; v1(126,109.5) 126,111.5 126.75,112.25 130.75,112.25 135.25,116.75 138.5,116.75 139.4,115.85 145.15,115.85 146.75,114.25 146.75,113.25 148.135,111.865 U3_H1.6
  Bottom Layer w0.4: v1(122.75,111) 122.75,111.25 124.5,109.5 v1(126,109.5)
H1-RPM: C17_H1.2 R13_H1.1 U1.43 | length 27.7
  Top Layer w0.4: U1.43@121.25,95.65 U1.43 121.2,98.45 121.25,98.5 v1(121.25,98.75)
  Bottom Layer w0.4: v1(121.25,98.75) 121.75,98.75 122.5,98 127.25,98 128.75,99.5 128.75,105.75 130.975,107.975 130.975,111.975 131.225,112.225 131.75,112.225 R13_H1.1
H1-TEMP: C15_H1.2 Q5_H1.1 Q5_H1.3 R6_H1.1 U1.42 | length 63.2
  Top Layer w0.4: v1(120.25,100.25) 120,100 120,98.265 120.4,97.865 U1.42 ; v1(146.75,116) 149.725,116 Q5_H1.1 151.55,116.95 152.5,116 Q5_H1.3
  Bottom Layer w0.4: v1(120.25,100.25) 122,100.25 123.25,99 127,99 128.1,100.1 128.1,106.35 130.25,108.5 130.25,112.5 128.5,114.25 128.5,118.95 129.8,120.25 131.525,120.25 C15_H1.2 R6_H1.1 132.5,118.75 133.25,118 133.25,117.5 133.95,116.8 137.056,116.8 137.506,116.35 146.4,116.35 v1(146.75,116)
H2-BEMF: C16_H2.2 R9_H2.2 U1.1 | length 19.6
  Top Layer w0.4: U1.1 123.65,96.85 v1(124.5,96)
  Bottom Layer w0.4: v1(124.5,96) 124.625,95.875 127.625,95.875 130.25,98.5 130.25,99.5 130.5,99.75 134.234,99.75 135.3,98.685 135.3,97.565 134.992,97.258 134.992,96.508 R9_H2.2 135.25,96.25 135.25,95.939 135.75,95.439 135.75,95.25 135.975,95.025 C16_H2.2
H2-CURR: C17_H2.1 C19_H2.2 R15_H2.2 U1.44 | length 19.7
  Top Layer w0.4: U1.44 122.4,95.6 123.5,94.5 v1(123.5,94)
  Bottom Layer w0.4: v1(123.5,94) 123.75,94 125,92.75 127,92.75 128.25,91.5 128.25,89 129.5,87.75 131.525,87.75 C17_H2.1 131.775,87.5 R15_H2.2 C19_H2.2
H2-LH: U1.13 U2_H2.5 | length 41.6
  Top Layer w0.4: U1.13 121.2,107.781 121.669,108.25 130.058,108.25 134,104.308 134,99.75 132.7,98.45 132.7,95.8 134,94.5 140,94.5 140.5,94 144.25,94 144.7,94.45 147.45,94.45 147.8,94.8 U2_H2.5
H2-LL: U1.12 U2_H2.6 | length 44.2
  Top Layer w0.4: U1.12 122,107.55 129.839,107.55 133.25,104.139 133.25,100.25 132,99 132,95.581 133.831,93.75 139.75,93.75 140.25,93.25 144.5,93.25 145.05,93.8 149.3,93.8 149.859,94.359 149.859,95.391 149.18,96.07 U2_H2.6
H2-RH: U1.11 U3_H2.5 | length 38.8
  Top Layer w0.4: U1.11 124.25,105.25 125.25,106.25 v1(126.25,106.25) ; v1(126,101) 130.5,96.5 130.5,95 133.25,92.25 137.811,92.25 138.111,91.95 144.8,91.95 146.05,90.7 146.05,89.7 146.742,89.008 146.742,88.008 147.405,87.345 U3_H2.5
  Bottom Layer w0.4: v1(126,101) 126,103.25 126.25,103.5 v1(126.25,106.25)
H2-RL: U1.10 U3_H2.6 | length 39.6
  Top Layer w0.4: U1.10 124.7,104.45 125.25,105 131.47,105 132.5,103.97 132.5,100.5 131.25,99.25 131.25,95.25 133.6,92.9 138.081,92.9 138.381,92.6 145.15,92.6 146.75,91 146.75,90 148.135,88.615 U3_H2.6
H2-RPM: C17_H2.2 R13_H2.1 U1.3 | length 16.9
  Top Layer w0.4: U1.3 123.725,98.775 124.894,98.775 126.35,97.319 126.35,95.981 127.5,94.831 v1(127.5,94)
  Bottom Layer w0.4: v1(127.5,94) 127.5,93.25 129,91.75 129,91.735 128.95,91.685 128.95,89.8 129.775,88.975 C17_H2.2 R13_H2.1
H2-TEMP: C15_H2.2 Q5_H2.1 Q5_H2.3 R6_H2.1 U1.2 | length 38.1
  Top Layer w0.4: U1.2 124.7,98.05 125.7,97.05 125.7,94.3 v1(125.75,94.25) ; v1(146.75,92.75) 149.725,92.75 Q5_H2.1 151.55,93.7 152.5,92.75 Q5_H2.3
  Bottom Layer w0.4: v1(125.75,94.25) 126.55,95.05 127.8,95.05 130.025,97.275 C15_H2.2 R6_H2.1 132.5,95.5 133.25,94.75 133.25,94.25 133.95,93.55 137.056,93.55 137.506,93.1 146.4,93.1 v1(146.75,92.75)
MA_H1: C13_H1.1 M1_H1.2 Q2_H1.1 Q4_H1.3 R10_H1.1 U2_H1.4 | length 40.2
  Top Layer w0.4: C13_H1.1 141.725,118.05 U2_H1.4 144.05,118.05 144.35,118.35 146.1,118.35 v1(146.75,119) ; Q2_H1.1@162.691,118.095 162.691,119.365 163.326,120 ; Q2_H1.1@162.691,120.635 163.326,120 ; v1(164.75,118.25) v1(164.75,120) ; v1(164.75,121.75) v1(164.75,120) ; Q4_H1.3@166.791,118.095 166.791,119.365 Q4_H1.3@166.791,120.635 ; 163.326,120 v1(164.75,120)
  Bottom Layer w0.4: v1(146.75,119) 147.95,120.2 152.065,120.2 152.365,120.5 161.75,120.5 162,120.75 164,120.75 v1(164.75,120) ; R10_H1.1@160.5,119 164,119 v1(164.75,118.25)
MA_H2: C13_H2.1 M1_H2.2 Q2_H2.1 Q4_H2.3 R10_H2.1 U2_H2.4 | length 32.3
  Top Layer w0.4: C13_H2.1 141.725,94.8 U2_H2.4 144.05,94.8 144.35,95.1 146.1,95.1 v1(146.75,95.75)
  Bottom Layer w0.4: v1(146.75,95.75) 147.95,96.95 150.315,96.95 ; 150.315,96.95 151.185,96.95 ; 151.185,96.95 153.065,96.95 153.464,97.35 161.519,97.35 161.669,97.5 163.75,97.5 164.5,96.75 v1(164.75,96.75) 164,97.5 164,97.75 v1(164.75,98.5) ; R10_H2.1 161.75,96.25 162.25,95.75 164,95.75 v1(164.75,95)
MB_H1: C14_H1.1 M1_H1.1 Q1_H1.1 Q3_H1.3 R8_H1.1 U3_H1.4 | length 63.8
  Top Layer w0.4: C14_H1.1@141,111.025 C14_H1.1@141.125,110.9 ; C14_H1.1 141.68,110.595 U3_H1.4 144.095,110.595 145.125,111.625 145.25,111.75 v1(145.5,111.75) ; Q1_H1.1@162.691,110.595 164.595,110.595 v1(164.75,110.75) v1(164.75,112.5) v1(164.75,114.25)
  Bottom Layer w0.4: R8_H1.1 161.75,116.75 177.765,116.75 178.265,116.25 179.75,116.25 182.29,113.71 M1_H1.1 174.04,113.71 ; v1(164.75,112.5) 163.5,113.75 154,113.75 153.085,112.835 150.335,112.835 150,112.5 146.25,112.5 v1(145.5,111.75) ; v1(145.5,111.75) 145.75,111.5 v1(145.5,111.75)
MB_H2: C14_H2.1 M1_H2.1 Q1_H2.1 Q3_H2.3 R8_H2.1 U3_H2.4 | length 61.9
  Top Layer w0.4: C14_H2.1@141,87.775 C14_H2.1@141.125,87.65 ; C14_H2.1 141.68,87.345 U3_H2.4 144.095,87.345 145.125,88.375 145.25,88.5 v1(145.5,88.5) ; Q1_H2.1@162.691,89.885 162.691,88.615 162.691,87.345 164.595,87.345 v1(164.75,87.5) ; v1(164.75,91) v1(164.75,89.25) v1(164.75,87.5) ; Q3_H2.3@166.791,88.615 166.791,87.345 164.905,87.345 v1(164.75,87.5)
  Bottom Layer w0.4: R8_H2.1 161.75,93.5 177,93.5 178,92.5 179.75,92.5 181.03,91.22 181.49,91.22 M1_H2.1 ; v1(164.75,89.25) 164,90 162.5,90 162,90.5 160.13,90.5 159.38,89.75 151.5,89.75 151,90.25 149.75,90.25 149,89.5 146.5,89.5 v1@145.5,88.5 ; v1(145.5,88.5) 145.75,88.25 v1(145.5,88.5)
NetC3_1: C3.1 D4.3 L1.1 U6.8 | length 23.1
  Top Layer w0.4: L1.1@143.25,106.35 143.25,108.75 143.5,109 153.25,109 154.5,107.75 U6.8 153.23,106.02 152,107.25 152,107.275 151.975,107.25 C3.1 ; D4.3@157.945,106.02 D4.3
  Top Layer w0.8: U6.8 D4.3@157.945,106.02
NetC3_2: C3.2 U6.1 | length 2.9
  Top Layer w0.4: U6.1 149.495,106.02 149.5,106.025 150,106.025 150.525,106.55 C3.2
NetC13_H1_2: C13_H1.2 U2_H1.2 | length 2.2
  Top Layer w0.4: C13_H1.2 142.21,119.975 142.825,120.59 U2_H1.2
NetC13_H2_2: C13_H2.2 U2_H2.2 | length 2.2
  Top Layer w0.4: C13_H2.2 141.96,96.725 142.575,97.34 U2_H2.2
NetC14_H1_2: C14_H1.2 U3_H1.2 | length 2.5
  Top Layer w0.4: C14_H1.2@141,112.475 C14_H1.2@141.125,112.6 ; C14_H1.2 141.91,113.135 U3_H1.2
NetC14_H2_2: C14_H2.2 U3_H2.2 | length 2.5
  Top Layer w0.4: C14_H2.2@141,89.225 C14_H2.2@141.125,89.35 ; C14_H2.2 141.91,89.885 U3_H2.2
NetC20_2: C20.2 F1.1 U5.1 U5.3 | length 18.1
  Top Layer w0.508: F1.1 114,87 114.75,86.25 122,86.25 122.69,86.94 122.69,88.56 ; U5.3 122.715,90.465 122.5,90.25 122.5,88.75 122.69,88.56 ; C20.2@126.5,88.6 123.79,88.6 U5.1 122.69,88.56
NetD1_3: D1.3 F1.2 | length 4
  Top Layer w0.508: D1.3 112.5,89.925 113.675,89.925 F1.2
NetD2_1: D2.1 R19.2 | length 2.2
  Top Layer w0.4: D2.1 R19.2
NetD3_1: D3.1 R20.2 | length 1.5
  Top Layer w0.4: D3.1 R20.2
NetQ1_H1_2: Q1_H1.2 U3_H1.3 | length 22.4
  Top Layer w0.4: U3_H1.3@142.984,111.82 U3_H1.3@143.275,111.82 ; U3_H1.3 143.865,111.865 144.75,112.75 144.75,113 v1(145,113.25) ; v1(159.5,115.75) 160.25,115.75 161.595,114.405 Q1_H1.2
  Bottom Layer w0.4: v1@145,113.25 145.25,113.5 148.5,113.5 151.25,116.25 159,116.25 v1(159.5,115.75)
NetQ1_H2_2: Q1_H2.2 U3_H2.3 | length 22.2
  Top Layer w0.4: U3_H2.3@142.984,88.57 U3_H2.3@143.275,88.57 ; U3_H2.3 143.865,88.615 144.75,89.5 144.75,89.75 v1(145,90) ; v1(159.25,92.25) 160.5,92.25 161.595,91.155 Q1_H2.2
  Bottom Layer w0.4: v1@145,90 145.25,90.25 148.5,90.25 150.5,92.25 152.75,92.25 153.25,91.75 158.75,91.75 v1(159.25,92.25)
NetQ2_H1_2: Q2_H1.2 U2_H1.3 | length 21
  Top Layer w0.4: U2_H1.3 145.07,119.32 v1(145.25,119.5) ; v1(160.5,122.5) 161,122.5 161.595,121.905 Q2_H1.2
  Bottom Layer w0.4: v1(145.25,119.5) 146,120.25 146.75,121 148.25,122.5 v1(160.5,122.5)
NetQ2_H2_2: Q2_H2.2 U2_H2.3 | length 21
  Top Layer w0.4: U2_H2.3 145.07,96.07 v1(145.25,96.25) ; v1(160.5,99.25) 161,99.25 161.595,98.655 Q2_H2.2
  Bottom Layer w0.4: v1(145.25,96.25) 146,97 146.75,97.75 148.75,97.75 150.25,99.25 v1(160.5,99.25)
NetQ3_H1_1: Q3_H1.1 Q4_H1.1 R14_H1.1 Rs1_H1.2 | length 47
  Top Layer w0.4: Q4_H1.1@174.191,118.095 174.25,118.036 174.25,117 175.5,117 176.75,115.75 Rs1_H1.2 176.75,111.5 177.325,110.925 177.925,110.925 178.5,111.5 v1(178.5,115)
  Bottom Layer w0.4: R14_H1.1 148.5,114.5 151,117 160.5,117 161.4,116.1 177.4,116.1 v1(178.5,115)
NetQ3_H1_2: Q3_H1.2 U3_H1.8 | length 26.4
  Top Layer w0.4: U3_H1.8 149.345,114.405 149.5,114.25 v1(152.5,114.25) ; v1(172,115) 172.5,115 173.095,114.405 Q3_H1.2
  Bottom Layer w0.4: v1(152.5,114.25) 153,114.25 153.25,114.5 160.25,114.5 161.085,115.335 171.665,115.335 v1(172,115)
NetQ3_H2_1: Q3_H2.1 Q4_H2.1 R14_H2.1 Rs1_H2.2 | length 42.5
  Top Layer w0.4: Q4_H2.1@174.191,94.845 174.191,93.809 174.25,93.75 ; Rs1_H2.2 177.35,97.9 177.467,98.017 178.017,98.017 178.5,97.534 178.5,91.75 v1(178,91.25)
  Bottom Layer w0.4: R14_H2.1 148.5,91.25 151.05,93.8 158.389,93.8 158.414,93.775 159.586,93.775 159.611,93.8 159.889,93.8 159.914,93.775 160.225,93.775 161.25,92.75 171.515,92.75 171.565,92.8 176.45,92.8 v1(178,91.25)
NetQ3_H2_2: Q3_H2.2 U3_H2.8 | length 26.8
  Top Layer w0.4: U3_H2.8 149.595,91.155 150.25,90.5 151.75,90.5 v1(152.25,91) ; v1(172,91.75) 172.5,91.75 173.095,91.155 Q3_H2.2
  Bottom Layer w0.4: v1(152.25,91) 159.5,91 160.585,92.085 171.665,92.085 v1(172,91.75)
NetQ4_H1_2: Q4_H1.2 U2_H1.8 | length 26.8
  Top Layer w0.4: U2_H1.8 149.64,121.86 150.25,121.25 v1(150.5,121.25) ; v1(172,122.5) 172.5,122.5 173.095,121.905 Q4_H1.2
  Bottom Layer w0.4: v1(150.5,121.25) 161.25,121.25 162.835,122.835 171.665,122.835 v1(172,122.5)
NetQ4_H2_2: Q4_H2.2 U2_H2.8 | length 26.9
  Top Layer w0.4: U2_H2.8 150.14,98.61 150.5,98.25 v1@150.5,97.75 ; v1(172,99.25) 172.5,99.25 173.095,98.655 Q4_H2.2
  Bottom Layer w0.4: v1(150.75,98) 161.25,98 162.835,99.585 171.665,99.585 v1(172,99.25)
NetR1_2: R1.2 R2.1 U6.4 | length 4.6
  Top Layer w0.4: R1.2 R2.1 147.25,103 148.04,102.21 U6.4
NetR7_H1_1: R7_H1.1 R8_H1.2 U4_H1.2 | length 25.5
  Bottom Layer w0.4: R7_H1.1 138.25,121 U4_H1.2 138.25,118.412 139.662,117 146.265,117 146.315,117.05 147.185,117.05 147.235,117 147.75,117 149.25,118.5 157.5,118.5 158,118 R8_H1.2
NetR7_H2_1: R7_H2.1 R8_H2.2 U4_H2.2 | length 25.5
  Bottom Layer w0.4: R7_H2.1 138.25,97.75 U4_H2.2 138.25,95.162 139.662,93.75 146.265,93.75 146.315,93.8 147.185,93.8 147.235,93.75 147.75,93.75 149.25,95.25 157.5,95.25 158,94.75 R8_H2.2
NetR10_H1_2: R10_H1.2 R11_H1.1 U4_H1.3 | length 24.2
  Bottom Layer w0.4: R11_H1.1 138.9,121.15 U4_H1.3 138.9,118.681 139.831,117.75 147.25,117.75 148.75,119.25 152.5,119.25 152.75,119.5 R10_H1.2
NetR10_H2_2: R10_H2.2 R11_H2.1 U4_H2.3 | length 24.2
  Bottom Layer w0.4: R11_H2.1 138.9,97.9 U4_H2.3 138.9,95.431 139.831,94.5 147.25,94.5 148.75,96 158.75,96 R10_H2.2
NetR12_H1_1: R12_H1.1 R14_H1.2 U4_H1.6 | length 10.7
  Bottom Layer w0.4: R12_H1.1 138.9,111.15 U4_H1.6 138.9,113.819 139.631,114.55 145.95,114.55 R14_H1.2
NetR12_H2_1: R12_H2.1 R14_H2.2 U4_H2.6 | length 10.7
  Bottom Layer w0.4: R12_H2.1 138.9,87.9 U4_H2.6 138.9,90.569 139.631,91.3 145.95,91.3 R14_H2.2
NetR16_H1_2: R16_H1.2 R17_H1.1 U4_H1.5 | length 11.4
  Bottom Layer w0.4: U4_H1.5 139.55,112.7 R17_H1.1 143.75,111.5 144.55,110.7 146.45,110.7 147.25,111.5 R16_H1.2
NetR16_H2_2: R16_H2.2 R17_H2.1 U4_H2.5 | length 11.4
  Bottom Layer w0.4: U4_H2.5 139.55,89.45 R17_H2.1 143.75,88.25 144.55,87.45 146.45,87.45 147.25,88.25 R16_H2.2
PDI: J4.10 U1.34 | length 13.3
  Top Layer w0.4: J4.10 110.34,90.84 114,94.5 U1.34
RST: C10.2 J4.9 R5.1 SW1.2 U1.35 | length 62.9
  Top Layer w0.4: v1(107.5,94.5) R5.1 106.54,92.04 101.95,92.04 J4.9 100.75,90.75 102,89.5 104,89.5 104.5,90 110.5,90 114.8,94.3 U1.35 ; SW1.2@109.25,121.25 109.25,113.25 109.25,112 110.25,111 v1(111,111) 116,111 C10.2
  Bottom Layer w0.4: v1(107.5,94.5) 108,95 108,107.25 111,110.25 v1(111,111)
RX: J4.3 U1.32 | length 13.2
  Top Layer w0.4: J4.3 102.04,99.75 105.15,99.75 107.325,97.575 110.736,97.575 111.211,98.05 U1.32
TX: J4.4 U1.33 | length 9.8
  Top Layer w0.4: J4.4 105.521,98.46 107.056,96.925 111.006,96.925 111.331,97.25 U1.33
VBAT: C22.2 J5.1 Q1_H1.3 Q1_H2.3 Q2_H1.3 Q2_H2.3 U6.7 | length 7.5
  Top Layer w0.508: J5.1@169.71,104.75 J5.1
  Top Layer w0.75: U6.7 160.25,104.75 C22.2
VBUS: D1.1 J3.1 | length 44.4
  Top Layer w0.4: 123.304,117.459 123.35,117.413
  Top Layer w0.508: v1(106,88.75) 106.2,88.95 D1.1 ; v1(121.5,119) 121.5,118.25 121.75,118 122.763,118 123.304,117.459 ; J3.1 123.35,117.413
  Bottom Layer w0.508: v1(106,88.75) 106,90.5 108.75,93.25 108.75,106.75 116,114 118.25,114 121.5,117.25 v1(121.5,119)
pads on no net: J3.10 J3.11 J4.7 J4.8 U1.4 U1.5 U1.6 U1.7 U1.24 U1.25 U1.36 U1.37 U5.4 U6.2 U6.3 U6.5

## Polygon pours and split planes (outlines as drawn)
GND on Bottom Layer "Top Layer-GND" (solid, pour order 34): 187,124 97,124 97,85 187,85
MA_H2 on Bottom Layer "MA_FILLB" (solid, pour order 23): 185,99.25 160.5,99.25 160.5,93.25 185,93.25
MB_H2 on Bottom Layer "MB_FILLB" (solid, pour order 25): 185,86.75 160.5,86.75 160.5,92.75 185,92.75
MB_H1 on Bottom Layer "MB_FILLB" (solid, pour order 24): 185,110 160.5,110 160.5,116 185,116
MA_H1 on Bottom Layer "MA_FILLB" (solid, pour order 22): 185,122.5 160.5,122.5 160.5,116.5 185,116.5
GND on Top Layer "GND_top" (solid, pour order 33): 187,124 97,124 97,85 187,85
VBAT on Top Layer "Top Layer-No Net" (solid, pour order 32): 153,110 153,99.25 172,99.25 172,110
GND on Top Layer "Top Layer-No Net" (solid, pour order 31): 172,99.25 175.25,99.25 175.245,97.775 177,97.775 177,99.25 185,99.25 185,110 177,110 177,111.5 175.27,111.5 175.245,111.475 175.25,110 172,110
NetQ3_H2_1 on Top Layer "GFILL" (solid, pour order 15): 172,99.25 172,86.75 177.25,86.75 177.5,86.75 177.5,99.25
MA_H2 on Top Layer "MA_FILL" (solid, pour order 17): 160.5,99.25 171.5,99.25 171.5,94.25 160.5,94.25
MB_H2 on Top Layer "MA_FILL" (solid, pour order 19): 160.5,91.75 171.5,91.75 171.5,86.75 160.5,86.75
VBAT on Top Layer "VBAT_FILL" (solid, pour order 21): 153,99.25 160,99.25 160,86.75 153,86.75
VBAT on Top Layer "VBAT_FILL" (solid, pour order 20): 153,122.5 160,122.5 160,110 153,110
MB_H1 on Top Layer "MA_FILL" (solid, pour order 18): 160.5,115 171.5,115 171.5,110 160.5,110
MA_H1 on Top Layer "MA_FILL" (solid, pour order 16): 160.5,122.5 171.5,122.5 171.5,117.5 160.5,117.5
NetQ3_H1_1 on Top Layer "GFILL" (solid, pour order 14): 172,122.5 172,110 177.25,110 177.5,110 177.5,122.5
NetC3_1 on Top Layer "SW" (solid, pour order 30): 158.397,105.453 158.397,106.697 155,106.697 155,109.25 153.25,109.25 142,109.25 142,104.746 145,104.746 145,107.5 145.75,108.25 151.75,108.25 151.75,105.5 151.797,105.453
GND on Top Layer "GNDSW" (solid, pour order 29): 162.25,103.5 159.5,103.5 159,104 152.5,104 152.5,102.25 152.5,101.25 158.75,101.25 159.5,102 162.25,102

## Other copper
Top Layer:
  pour cut-out: 171.25,109.75 171.25,108.25 172.75,108.25 172.75,109.75
  text "M1" at 185.25,107.25 h1.52 r90
  text "+" at 164.25,103.75 h1.52
  text "POWER" at 180.75,101 h1.52 r90
  text "M2" at 185.25,100 h1.52 r90
Bottom Layer:
  pour cut-out: 171.25,109.75 171.25,108.25 173,108.25 173,109.75
  pour cut-out: 152.75,87.5 154.25,87.5 154.25,86 152.75,86
  text "Warranty voided if burned" at 122.5,121.5 h1
  text "MOTOR-DRIVER / REV 1.1" at 122.5,86 h1.2

## Silkscreen, mask and mechanical layers (free items; w line width, h text height)
Top Solder:
  rectangle: 154.25,94.25 163.75,99.25
  rectangle: 165.75,94.25 175.25,99.25
  rectangle: 165.75,86.75 175.25,91.75
  rectangle: 154.25,86.75 163.75,91.75
  rectangle: 165.75,110 175.25,115
  rectangle: 165.75,117.5 175.25,122.5
  rectangle: 154.25,117.5 163.75,122.5
  rectangle: 154.25,110 163.75,115
  rectangle: 183.25,106.75 185.75,109.75
  rectangle: 183.25,99.5 185.75,103
  rectangle: 178.75,100.5 181.25,108.5
  rectangle: 163.75,103.5 165.75,105.5
Bottom Solder:
  rectangle: 108,86 122.75,90
  rectangle: 98,120.75 123,123
Mechanical 16:
  drawing of 1872 lines, arcs and shapes, not listed
  text "1" at 36.246,189.611 h1.78
  text "2" at 108.89,189.611 h1.78
  text "3" at 182.042,189.611 h1.78
  text "4" at 254.94,189.611 h1.78
  text "A" at 1.905,166.599 h1.78
  text "A" at 288.925,166.599 h1.78
  text "B" at 1.905,118.542 h1.78
  text "B" at 289.179,114.783 h1.78
  text "C" at 1.905,70.028 h1.78
  text "C" at 288.925,70.028 h1.78
  text "ENGINEER:" at 173.99,33.02 h1.14
  text "TITLE:" at 212.09,33.02 h1.14
  text "PCB DESIGNER:" at 173.99,25.527 h1.14
  text "D" at 1.905,22.022 h1.78
  text "D" at 288.925,22.022 h1.78
  text "DATE:" at 173.99,17.78 h1.14
  text "PART NO.:" at 212.09,17.78 h1.14
  text "REV:" at 265.43,17.78 h1.14
  text "Altium Limited" at 140.97,15.24 h1.78
  text ".PRINT_DATE" at 175.26,14.732 h1.78
  text "12a Rodborough Rd" at 140.97,12.7 h1.78
  text "Frenchs Forest" at 140.97,10.16 h1.78
  text "FILE NAME:" at 173.99,10.16 h1.14
  text "DWG NO:" at 212.09,10.16 h1.14
  text "SCALE:" at 265.43,10.16 h1.14
  text "NSW 2086" at 140.97,7.62 h1.78
  text ".PCB_FILE_NAME_NO_PATH" at 175.26,7.112 h1.78
  text "1" at 36.246,1.651 h1.78
  text "2" at 108.89,1.651 h1.78
  text "3" at 182.042,1.651 h1.78
  text "4" at 254.94,1.651 h1.78